# EAGLE board Rpi (EAGLE 9.2.2)
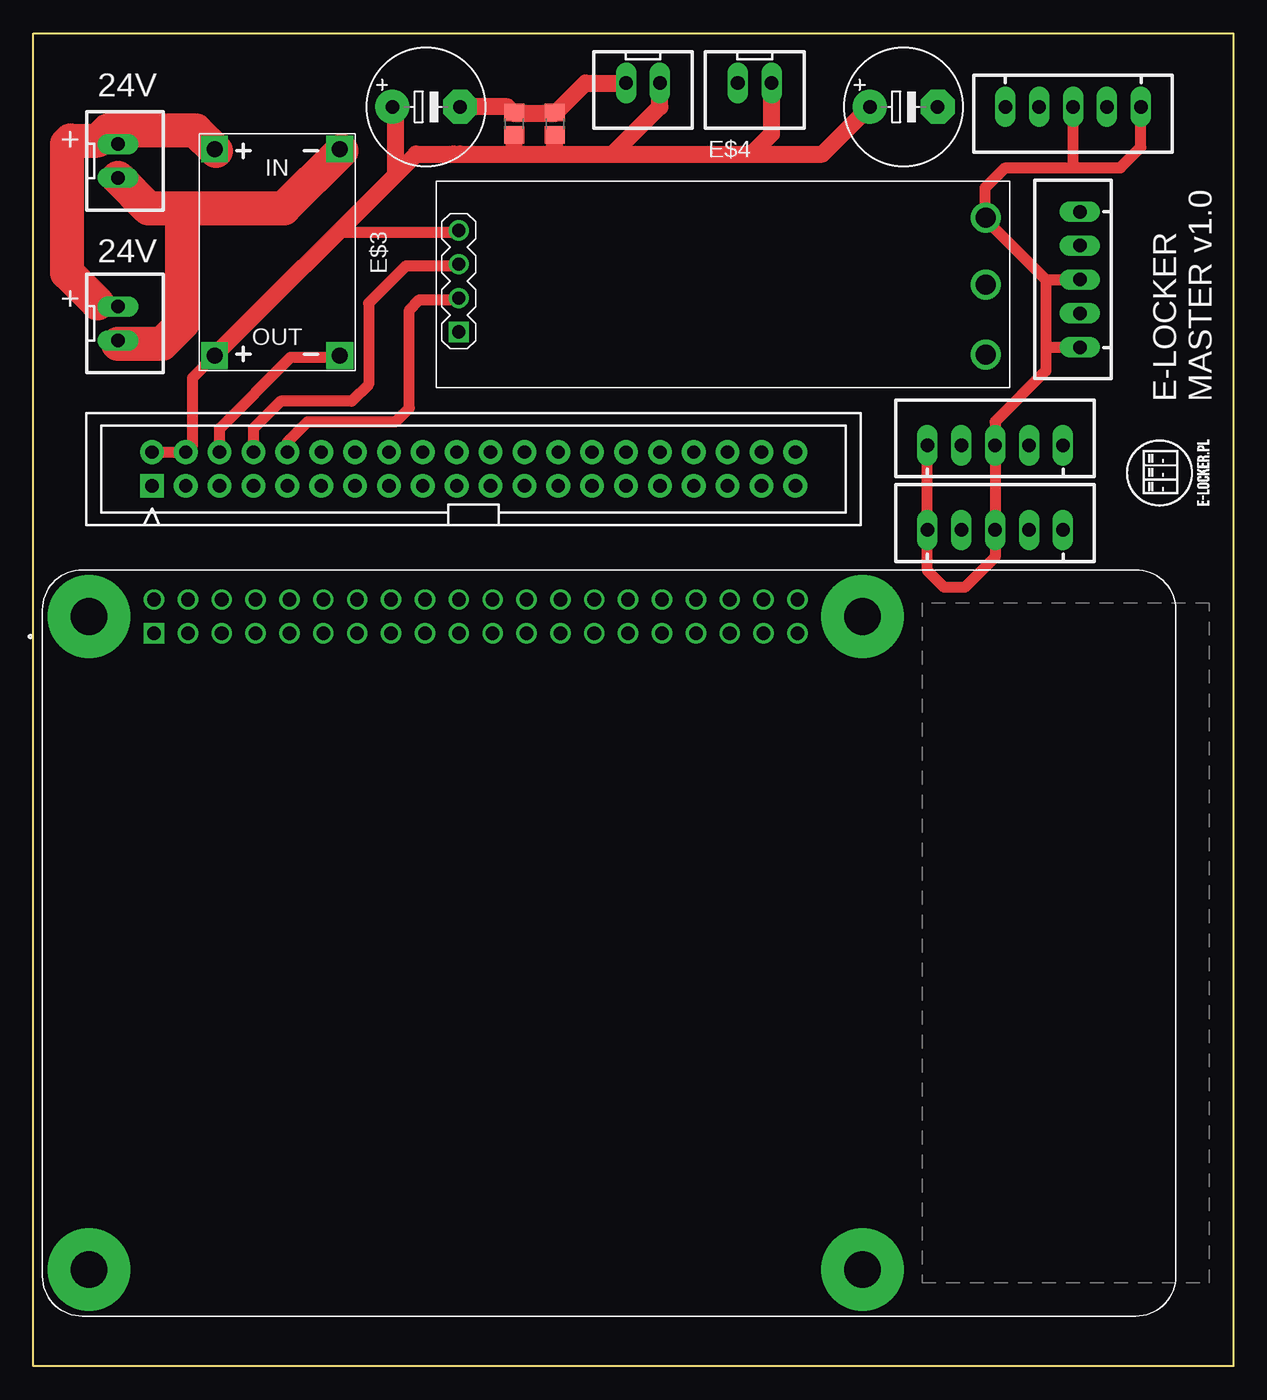
[diagram p0: board, top side]
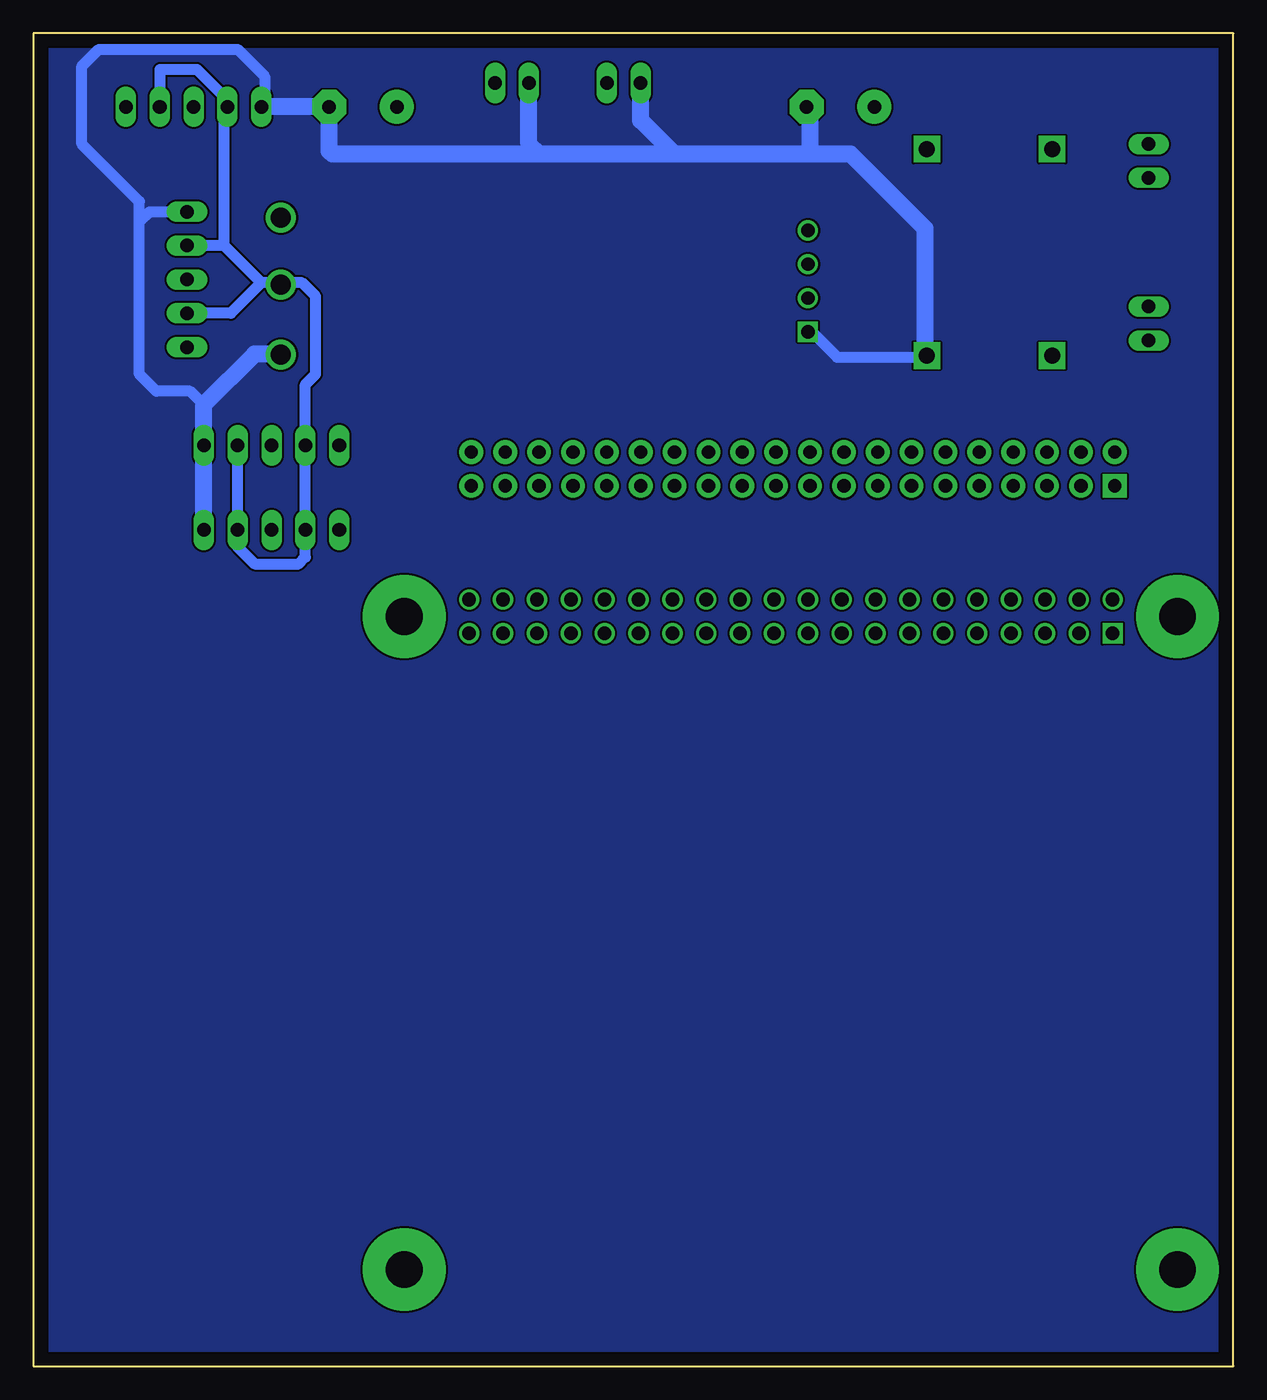
[diagram p1: board, bottom side, seen from below]

Size 90 x 100 mm. Coordinates in mm from the lower left corner, seen from the top.
Outline: 0,0 0,100 90,100 90,0 0,0
Copper layers (1*16): Top 0.035mm / dielectric 1.5mm / Bottom 0.035mm
Design rules "default": minimum track width 6mil, minimum drill 0.35mm, track to track 6mil, track to pad 6mil, pad to pad 6mil, via to via 6mil, smd to smd 6mil, copper to edge 40mil, drill to drill 6mil, minimum pad ring 10mil, minimum via ring 8mil, stop-mask expansion 4mil, vias tented up to drill 0mil, thermal gap 10mil

## Footprints (pad centres in the part's own frame; a part is rotated, then mirrored left to right if it is on the bottom)
MODULE_RASPBERRY_PI_3_MODEL_B+ = drill 1.016 square: 1 -34.13,23.23 | drill 1.016: 2 -34.13,25.77; 3 -31.59,23.23; 4 -31.59,25.77; 5 -29.05,23.23; 6 -29.05,25.77; 7 -26.51,23.23; 8 -26.51,25.77; 9 -23.97,23.23; 10 -23.97,25.77; 11 -21.43,23.23; 12 -21.43,25.77; 13 -18.89,23.23; 14 -18.89,25.77; 15 -16.35,23.23; 16 -16.35,25.77; 17 -13.81,23.23; 18 -13.81,25.77; 19 -11.27,23.23; 20 -11.27,25.77; 21 -8.73,23.23; 22 -8.73,25.77; 23 -6.19,23.23; 24 -6.19,25.77; 25 -3.65,23.23; 26 -3.65,25.77; 27 -1.11,23.23; 28 -1.11,25.77; 29 1.43,23.23; 30 1.43,25.77; 31 3.97,23.23; 32 3.97,25.77; 33 6.51,23.23; 34 6.51,25.77; 35 9.05,23.23; 36 9.05,25.77; 37 11.59,23.23; 38 11.59,25.77; 39 14.13,23.23; 40 14.13,25.77 | drill 2.75 pad 6.2: S1 -39,24.5; S2 19,24.5; S3 19,-24.5; S4 -39,-24.5
RASPI_GPIO_B+_BOX = drill 1 pad 1.778 square: 1 -24.13,-1.27 | drill 1 pad 1.778: 2 -24.13,1.27; 3 -21.59,-1.27; 4 -21.59,1.27; 5 -19.05,-1.27; 6 -19.05,1.27; 7 -16.51,-1.27; 8 -16.51,1.27; 9 -13.97,-1.27; 10 -13.97,1.27; 11 -11.43,-1.27; 12 -11.43,1.27; 13 -8.89,-1.27; 14 -8.89,1.27; 15 -6.35,-1.27; 16 -6.35,1.27; 17 -3.81,-1.27; 18 -3.81,1.27; 19 -1.27,-1.27; 20 -1.27,1.27; 21 1.27,-1.27; 22 1.27,1.27; 23 3.81,-1.27; 24 3.81,1.27; 25 6.35,-1.27; 26 6.35,1.27; 27 8.89,-1.27; 28 8.89,1.27; 29 11.43,-1.27; 30 11.43,1.27; 31 13.97,-1.27; 32 13.97,1.27; 33 16.51,-1.27; 34 16.51,1.27; 35 19.05,-1.27; 36 19.05,1.27; 37 21.59,-1.27; 38 21.59,1.27; 39 24.13,-1.27; 40 24.13,1.27
DC-DC-STEP-DOWN-MP2307 = drill 1.2 pad 2 square: IN+ -7.747,-4.699; IN- -7.747,4.699; OUT+ 7.747,-4.699; OUT- 7.747,4.699
RS485-TTL-CONVERTER = drill 1.5: A 41.2,12.75; B 41.2,7.75; GND2 41.2,2.5 | drill 1 square: GND 1.68,4.19 | drill 1: RX 1.68,6.73; TX 1.68,9.27; VCC 1.68,11.81
JST-XH-02-PACKAGE-LONG-PAD = drill 1.016 long: 1 -1.27,0; 2 1.27,0
E5-8,5 = drill 1.016 pad 2.54: + -2.54,0 | drill 1.016 pad 2.54 octagon: - 2.54,0
C0805 = smd 1.3 x 1.5: 1 -0.85,0; 2 0.85,0
JST-XH-05-PACKAGE-LONG-PAD = drill 1.016 long: 1 -5.08,0; 2 -2.54,0; 3 0,0; 4 2.54,0; 5 5.08,0

## Placement (x,y rotation side)
E$1  [MODULE_RASPBERRY_PI_3_MODEL_B+]  43.18,31.75 0 top
E$2  [RASPI_GPIO_B+_BOX]  33.02,67.31 0 top
E$3  [DC-DC-STEP-DOWN-MP2307]  18.29,83.57 270 top
E$4  [RS485-TTL-CONVERTER]  30.23,73.41 0 top
E$5  [JST-XH-02-PACKAGE-LONG-PAD]  6.35,78.23 270 top
E$6  [JST-XH-02-PACKAGE-LONG-PAD]  6.35,90.42 270 top
E$7  [JST-XH-02-PACKAGE-LONG-PAD]  45.72,96.27 180 top
E$8  [JST-XH-02-PACKAGE-LONG-PAD]  54.1,96.27 180 top
E$9  [E5-8,5]  29.46,94.49 0 top
E$10  [E5-8,5]  65.28,94.49 0 top
E$11  [C0805]  36.07,93.22 90 top
E$12  [C0805]  39.12,93.22 90 top
E$13  [JST-XH-05-PACKAGE-LONG-PAD]  72.14,69.09 0 top
E$14  [JST-XH-05-PACKAGE-LONG-PAD]  72.14,62.74 0 top
E$15  [JST-XH-05-PACKAGE-LONG-PAD]  78.49,81.53 90 top
E$16  [JST-XH-05-PACKAGE-LONG-PAD]  77.98,94.49 180 top
E$17  [ELOCKER]  88.39,64.52 90 top

## Library data of the parts
E$1 = RASPBERRY_PI_3_MODEL_B_
E$2 = raspberrypi_bastelstube_v13
E$3 = diy-modules
E$4 E$17 = zort-library
E$5-E$8 E$13-E$16 = Rembrandt Electronics - JST XH Connectors v1-0
E$9-E$12 = adafruit

## Nets
S$3: E$6.2
S$4: E$2.2 E$2.4
S$5: E$2.6
S$8: E$2.8
S$9: E$2.10

## Tracks (layer width: path | path; a pad name or v marks a point on that pad's centre or on a via)
GND
  Bottom 0.813: 23.11,75.69 29.72,75.69 31.75,77.72 | 78.23,86.61 81.28,86.61 82.04,85.85 | 82.04,85.85 82.04,74.42 80.77,73.15 78.23,73.15 77.22,72.14 | 82.04,85.85 82.04,87.38 86.36,91.69 86.36,97.54 85.09,98.81 74.68,98.81 72.64,96.77 72.64,94.74 72.9,94.49
  Bottom 1.27: 23.11,75.69 23.11,85.34 28.7,90.93 31.75,90.93 | 41.91,90.93 44.45,93.47 44.45,96.27 | 31.75,90.93 41.91,90.93 | 41.91,90.93 52.07,90.93 | 52.83,96.27 52.83,91.69 52.07,90.93 | 31.75,90.93 31.75,94.23 32,94.49 | 52.07,90.93 67.56,90.93 67.82,91.19 67.82,94.49 72.9,94.49 | 71.12,75.95 73.41,75.95 77.22,72.14 77.22,61.98
  pour Bottom: 0.51,99.57 89.15,99.57 89.15,0.76 0.76,0.76 0.51,0.51
S$1
  Top 1.27: 55.37,96.27 55.37,92.46 53.85,90.93 | 31.5,90.93 36.07,90.93 | 36.07,90.93 39.12,90.93 | 39.12,90.93 43.43,90.93 | 43.43,90.93 53.85,90.93 | 43.43,90.93 46.99,94.49 46.99,96.27 | 53.85,90.93 59.18,90.93 62.74,94.49 | 36.07,90.93 36.07,92.2 | 39.12,90.93 39.12,92.2
S$2
  Top 2.54: 4.83,79.76 2.54,82.04 2.54,91.69 2.79,91.95 4.83,91.95 5.59,92.71 12.19,92.71 13.72,91.19
S$3
  Top 2.54: 6.35,76.71 9.65,76.71 11.18,78.23 11.18,86.87 | E$6.2 8.64,86.87 11.18,86.87 | 11.18,86.87 18.8,86.87 23.11,91.19
S$4
  Top 0.813: E$2.2 E$2.4 11.94,69.09 11.94,74.17 13.46,75.69 13.72,75.69
  Top 1.27: 13.46,75.69 27.18,89.41 | 27.18,89.41 28.7,90.93 32,90.93 | 27.18,89.41 27.18,94.23 26.92,94.49
S$5
  Top 0.813: E$2.6 13.97,70.36 19.3,75.69 23.11,75.69
S$7
  Top 0.813: 13.46,75.95 22.61,85.09 32,85.09
S$8
  Top 0.813: 32,82.55 27.94,82.55 25.15,79.76 25.15,73.66 23.88,72.39 18.54,72.39 16.51,70.36 E$2.8
S$9
  Top 0.813: E$2.10 19.05,69.34 20.57,70.87 27.18,70.87 28.19,71.88 28.19,79.25 28.96,80.01 32,80.01
S$10
  Top 1.27: 32,94.49 35.56,94.49 36.07,93.98 39.12,93.98 41.4,96.27 44.45,96.27
S$11
  Top 0.813: 78.23,89.92 72.9,89.92 71.37,88.39 71.37,86.11 75.95,81.53 | 78.23,89.92 81.53,89.92 83.06,91.44 83.06,94.49 | 78.23,89.92 77.98,90.17 77.98,94.49 | 75.95,81.53 78.74,81.53 | 75.95,81.53 75.95,76.45 | 75.95,76.45 78.49,76.45 | 75.95,76.45 75.95,74.68 72.14,70.87 72.14,60.71 69.85,58.42 68.33,58.42 67.06,59.69 67.06,69.09
S$12
  Bottom 0.813: 74.68,69.09 74.68,61.47 73.41,60.2 70.1,60.2 69.6,60.71 69.6,73.66 68.83,74.42 68.83,80.26 69.85,81.28 72.9,81.28 | 72.9,81.28 75.18,78.99 78.49,78.99 | 72.9,81.28 75.69,84.07 | 75.69,84.07 78.23,84.07 | 75.69,84.07 75.69,94.23 | 75.69,94.23 75.44,94.49 | 75.69,94.23 75.69,95.25 77.72,97.28 80.52,97.28 80.52,94.49

## Text on the board
tPlace: 24V | + | 24V | + | E-LOCKER / MASTER v1.0